# EAGLE board Qwiic GPS-RTK2 - ublox ZED-F9P-Panel (EAGLE 9.2.2), part 1 of 3
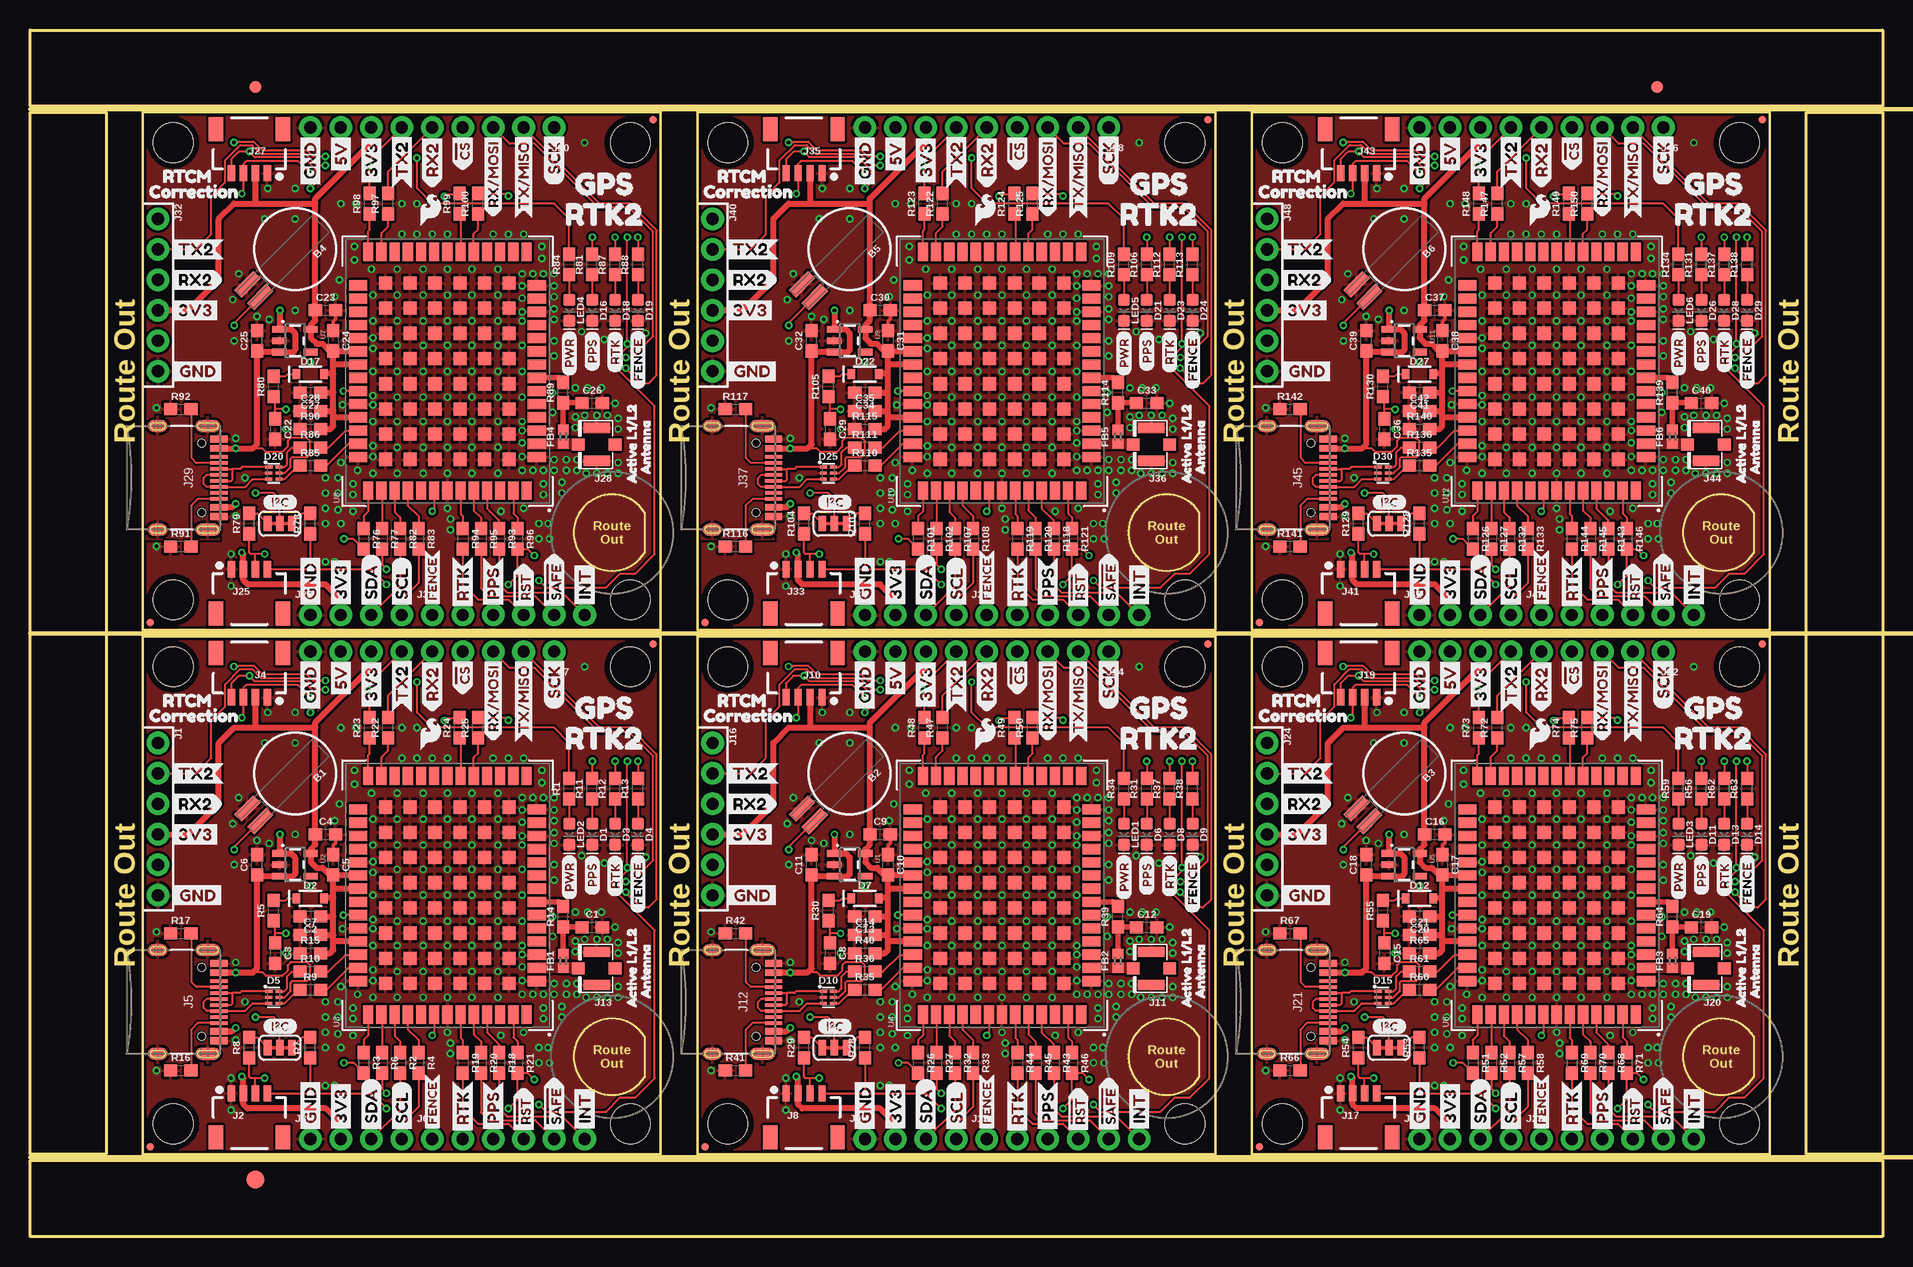
[diagram p0: board, top side]
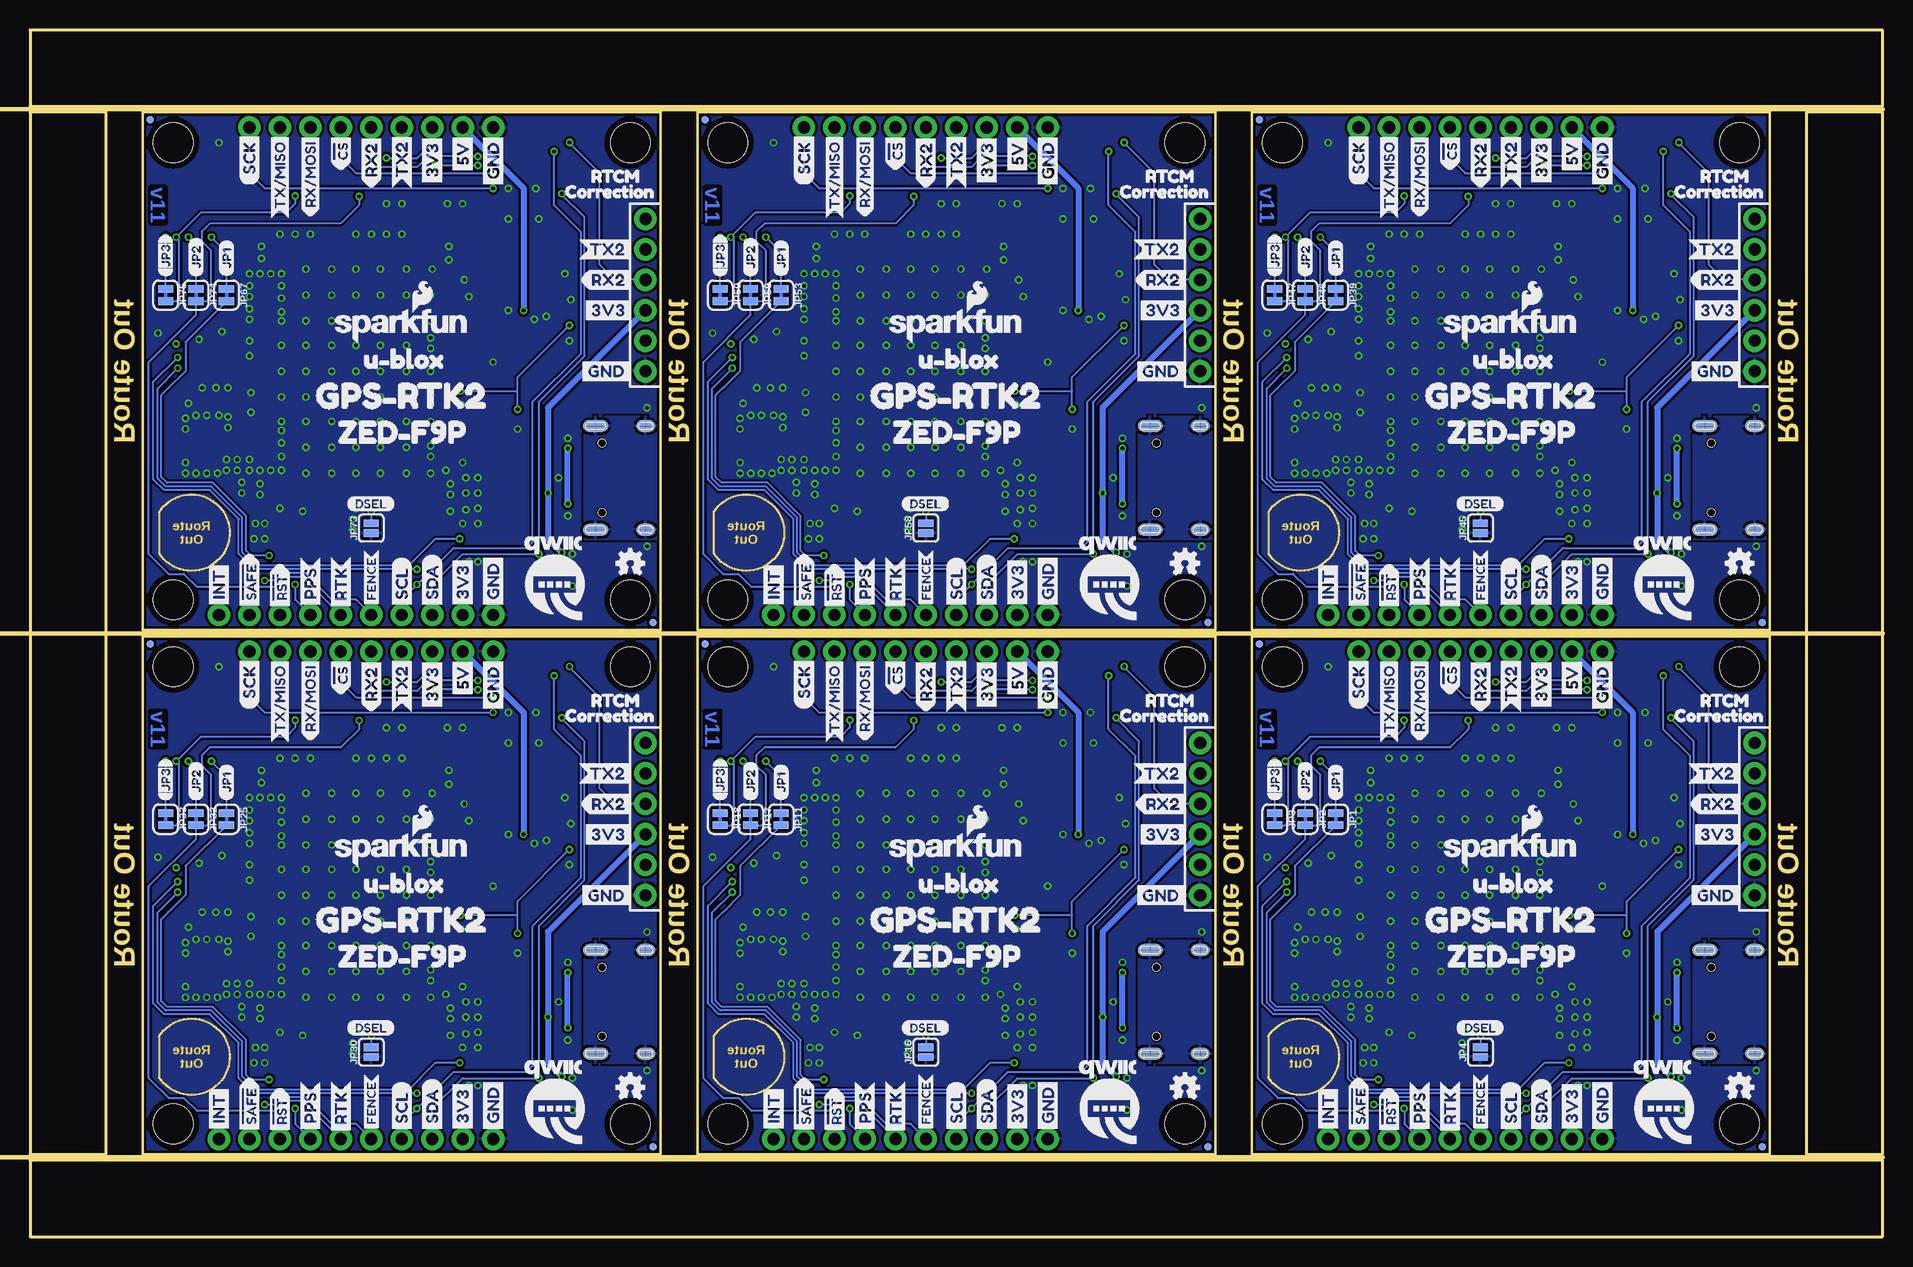
[diagram p1: board, bottom side, seen from below]

Size 154.43 x 100.58 mm. Coordinates in mm from the lower left corner, seen from the top.
Outline: 52.58,6.86 9.4,6.86 9.4,50.04 52.58,50.04 52.58,6.86
Outline: 98.81,6.86 55.63,6.86 55.63,50.04 98.81,50.04 98.81,6.86
Outline: 145.03,6.86 101.85,6.86 101.85,50.04 145.03,50.04 145.03,6.86
Outline: 52.58,50.55 9.4,50.55 9.4,93.73 52.58,93.73 52.58,50.55
Outline: 98.81,50.55 55.63,50.55 55.63,93.73 98.81,93.73 98.81,50.55
Outline: 145.03,50.55 101.85,50.55 101.85,93.73 145.03,93.73 145.03,50.55
Outline: 0,6.35 154.43,6.35 154.43,0 0,0 0,6.35
Outline: 148.08,93.73 154.43,93.73 154.43,6.86 148.08,6.86 148.08,93.73
Outline: 0,100.58 154.43,100.58 154.43,94.23 0,94.23 0,100.58
Outline: 0,93.73 6.35,93.73 6.35,6.86 0,6.86 0,93.73
Copper layers (1*16): Top 0.035mm / dielectric 1.5mm / Bottom 0.035mm
Design rules "SparkFun-2-layer-PCBWay-LIMIT": minimum track width 6mil, minimum drill 0.3mm, track to track 6mil, track to pad 6mil, pad to pad 6mil, via to via 6mil, smd to smd 6mil, copper to edge 6mil, drill to drill 6mil, minimum pad ring 6mil, minimum via ring 6mil, stop-mask expansion 4mil, vias tented up to drill 25mil, thermal gap 10mil
Net classes: 2 3.3V: width 0.508 mm
tRestrict: area 46.7,21.6 to 48.1,23.1; area 93,21.6 to 94.4,23.1; area 139.2,21.6 to 140.6,23.1; area 46.7,65.3 to 48.1,66.8; area 93,65.3 to 94.4,66.8; area 139.2,65.3 to 140.6,66.8
Milling: 3 lines

## Footprints (pad centres in the part's own frame; a part is rotated, then mirrored left to right if it is on the bottom)
BATTCON-6.8MM = smd 2.25 x 0.85: + 4.87,0.75; - 4.87,-0.75
0603 = smd 1.1 x 1: 1 -0.85,0; 2 0.85,0
LED-0603 = smd 1 x 1: A -0.877,0; C 0.877,0
SOD-323 = smd 0.63 x 0.83: A 1.15,0; C -1.15,0
SOT886 = smd 0.61 x 0.25: 1 -0.405,0.5 | smd 0.56 x 0.25: 2 -0.43,0; 3 -0.43,-0.5; 4 0.43,-0.5; 5 0.43,0; 6 0.43,0.5
FIDUCIAL-1X2 = smd 1 x 1: 1 0,0
FIDUCIAL-1.5X3 = smd 1.5 x 1.5: 1 0,0
0402 = smd 0.85 x 0.9: 1 -0.58,0; 2 0.58,0
1X06_NO_SILK = drill 1.016 pad 1.88: 1 0,0; 2 2.54,0; 3 5.08,0; 4 7.62,0; 5 10.16,0; 6 12.7,0
1X04_1MM_RA = smd 0.6 x 1.35: 1 -1.5,0; 2 -0.5,0; 3 0.5,0; 4 1.5,0 | smd 1.2 x 2: NC1 2.8,-3.675; NC2 -2.8,-3.675
1X04_NO_SILK = drill 1.016 pad 1.88: 1 0,0; 2 2.54,0; 3 5.08,0; 4 7.62,0
USB-C-16P = smd 0.3 x 1.45: A5 -1.25,0; A6 -0.25,0; A7 0.25,0; A8 1.25,0; B5 1.75,0; B6 0.75,0; B7 -0.75,0; B8 -1.75,0 | smd 0.6 x 1.45: GND -3.225,0; GND2 3.225,0 | smd 1 x 2.1: SHLD1 -4.32,-0.915; SHLD2 4.32,-0.915 | smd 1 x 2.1 bottom: SHLD3 -4.32,-0.915; SHLD4 4.32,-0.915 | smd 1 x 1.6: SHLD5 -4.32,-5.095; SHLD8 4.32,-5.095 | smd 1 x 1.6 bottom: SHLD6 -4.32,-5.095; SHLD7 4.32,-5.095 | smd 0.55 x 1.45: VBUS1 -2.45,0; VBUS2 2.45,0 | hole 0.65: -2.89,-1.445; 2.89,-1.445
1X09_NO_SILK = drill 1.016 pad 1.88: 1 0,0; 2 2.54,0; 3 5.08,0; 4 7.62,0; 5 10.16,0; 6 12.7,0; 7 15.24,0; 8 17.78,0; 9 20.32,0
U.FL = smd 2.2 x 0.85: 1 0,1.375; 2 0,-1.375 | smd 1.05 x 1: FEED 1.525,0; NC -1.525,0
SMT-JUMPER_2_NC_TRACE_SILK = smd 0.635 x 1.27: 1 -0.508,0; 2 0.508,0
SMT-JUMPER_2_NO_SILK = smd 0.635 x 1.27: 1 -0.406,0; 2 0.406,0
SMT-JUMPER_3_2-NC_TRACE_SILK = smd 0.635 x 1.27: 1 -1.016,0; 2 0,0; 3 1.016,0
STAND-OFF = hole 3.302: 0,0
MICRO-FIDUCIAL = smd 0.635 x 0.635: 1 0,0
SOT23-5 = smd 0.55 x 1.2: 1 -0.95,-1.3; 2 0,-1.3; 3 0.95,-1.3; 4 0.95,1.3; 5 -0.95,1.3
ZED-F9P = smd 0.85 x 1.52: 1 -7.15,-7.45; 2 -6.05,-7.45; 3 -4.95,-7.45; 4 -3.85,-7.45; 5 -2.75,-7.45; 6 -1.65,-7.45; 7 -0.55,-7.45; 8 0.55,-7.45; 9 1.65,-7.45; 10 2.75,-7.45; 11 3.85,-7.45; 12 4.95,-7.45; 13 6.05,-7.45; 14 7.15,-7.45; 28 7.15,7.45; 29 6.05,7.45; 30 4.95,7.45; 31 3.85,7.45; 32 2.75,7.45; 33 1.65,7.45; 34 0.55,7.45; 35 -0.55,7.45; 36 -1.65,7.45; 37 -2.75,7.45; 38 -3.85,7.45; 39 -4.95,7.45; 40 -6.05,7.45; 41 -7.15,7.45 | smd 1.52 x 0.85: 15 9.95,-6.6; 16 9.95,-5.5; 17 9.95,-4.4; 18 9.95,-3.3; 19 9.95,-2.2; 20 9.95,-1.1; 21 9.95,0; 22 9.95,1.1; 23 9.95,2.2; 24 9.95,3.3; 25 9.95,4.4; 26 9.95,5.5; 27 9.95,6.6; 42 -9.95,6.6; 43 -9.95,5.5; 44 -9.95,4.4; 45 -9.95,3.3; 46 -9.95,2.2; 47 -9.95,1.1; 48 -9.95,0; 49 -9.95,-1.1; 50 -9.95,-2.2; 51 -9.95,-3.3; 52 -9.95,-4.4; 53 -9.95,-5.5; 54 -9.95,-6.6 | smd 1.1 x 1.1: 55 -1.05,-1.05; 56 -3.15,-1.05; 57 -5.25,-1.05; 58 -7.35,-1.05; 59 -1.05,-3.1; 60 -3.15,-3.1; 61 -5.25,-3.1; 62 -7.35,-3.1; 63 -1.05,-5.15; 64 -3.15,-5.15; 65 -5.25,-5.15; 66 -7.35,-5.15; 67 -1.05,5.15; 68 -3.15,5.15; 69 -5.25,5.15; 70 -7.35,5.15; 71 -1.05,3.1; 72 -3.15,3.1; 73 -5.25,3.1; 74 -7.35,3.1; 75 -1.05,1.05; 76 -3.15,1.05; 77 -5.25,1.05; 78 -7.35,1.05; 79 1.05,1.05; 80 3.15,1.05; 81 5.25,1.05; 82 7.35,1.05; 83 1.05,3.1; 84 3.15,3.1; 85 5.25,3.1; 86 7.35,3.1; 87 1.05,5.15; 88 3.15,5.15; 89 5.25,5.15; 90 7.35,5.15; 91 1.05,-5.15; 92 3.15,-5.15; 93 5.25,-5.15; 94 7.35,-5.15; 95 1.05,-3.1; 96 3.15,-3.1; 97 5.25,-3.1; 98 7.35,-3.1; 99 1.05,-1.05; 100 3.15,-1.05; 101 5.25,-1.05; 102 7.35,-1.05

## Placement (x,y rotation side)
B1  6.8MM_COIN_CELL  [BATTCON-6.8MM]  22.1,38.61 225 top
B2  6.8MM_COIN_CELL  [BATTCON-6.8MM]  68.33,38.61 225 top
B3  6.8MM_COIN_CELL  [BATTCON-6.8MM]  114.55,38.61 225 top
B4  6.8MM_COIN_CELL  [BATTCON-6.8MM]  22.1,82.3 225 top
B5  6.8MM_COIN_CELL  [BATTCON-6.8MM]  68.33,82.3 225 top
B6  6.8MM_COIN_CELL  [BATTCON-6.8MM]  114.55,82.3 225 top
C1  47pF  [0603]  46.86,25.78 0 top
C2  1.0uF  [0603]  23.37,26.67 180 top
C3  1.0uF  [0603]  20.45,23.62 270 top
C4  1.0uF  [0603]  24.64,33.53 0 top
C5  0.1uF  [0603]  25.27,30.99 270 top
C6  1.0uF  [0603]  18.92,30.99 90 top
C7  0.1uF  [0603]  23.37,25.15 0 top
C8  1.0uF  [0603]  66.67,23.62 270 top
C9  1.0uF  [0603]  70.87,33.53 0 top
C10  0.1uF  [0603]  71.5,30.99 270 top
C11  1.0uF  [0603]  65.15,30.99 90 top
C12  47pF  [0603]  93.09,25.78 0 top
C13  1.0uF  [0603]  69.6,26.67 180 top
C14  0.1uF  [0603]  69.6,25.15 0 top
C15  1.0uF  [0603]  112.9,23.62 270 top
C16  1.0uF  [0603]  117.09,33.53 0 top
C17  0.1uF  [0603]  117.73,30.99 270 top
C18  1.0uF  [0603]  111.38,30.99 90 top
C19  47pF  [0603]  139.32,25.78 0 top
C20  1.0uF  [0603]  115.82,26.67 180 top
C21  0.1uF  [0603]  115.82,25.15 0 top
C22  1.0uF  [0603]  20.45,67.31 270 top
C23  1.0uF  [0603]  24.64,77.22 0 top
C24  0.1uF  [0603]  25.27,74.68 270 top
C25  1.0uF  [0603]  18.92,74.68 90 top
C26  47pF  [0603]  46.86,69.47 0 top
C27  1.0uF  [0603]  23.37,70.36 180 top
C28  0.1uF  [0603]  23.37,68.83 0 top
C29  1.0uF  [0603]  66.67,67.31 270 top
C30  1.0uF  [0603]  70.87,77.22 0 top
C31  0.1uF  [0603]  71.5,74.68 270 top
C32  1.0uF  [0603]  65.15,74.68 90 top
C33  47pF  [0603]  93.09,69.47 0 top
C34  1.0uF  [0603]  69.6,70.36 180 top
C35  0.1uF  [0603]  69.6,68.83 0 top
C36  1.0uF  [0603]  112.9,67.31 270 top
C37  1.0uF  [0603]  117.09,77.22 0 top
C38  0.1uF  [0603]  117.73,74.68 270 top
C39  1.0uF  [0603]  111.38,74.68 90 top
C40  47pF  [0603]  139.32,69.47 0 top
C41  1.0uF  [0603]  115.82,70.36 180 top
C42  0.1uF  [0603]  115.82,68.83 0 top
D1  Yellow  [LED-0603]  46.86,33.53 270 top
D2  0.5A/40V/420mV  [SOD-323]  23.37,28.19 0 top
D3  GREEN  [LED-0603]  48.77,33.53 270 top
D4  BLUE  [LED-0603]  50.67,33.53 270 top
D5  PRTR5V0U2F  [SOT886]  20.32,19.94 0 top
D6  Yellow  [LED-0603]  93.09,33.53 270 top
D7  0.5A/40V/420mV  [SOD-323]  69.6,28.19 0 top
D8  GREEN  [LED-0603]  95,33.53 270 top
D9  BLUE  [LED-0603]  96.9,33.53 270 top
D10  PRTR5V0U2F  [SOT886]  66.55,19.94 0 top
D11  Yellow  [LED-0603]  139.32,33.53 270 top
D12  0.5A/40V/420mV  [SOD-323]  115.82,28.19 0 top
D13  GREEN  [LED-0603]  141.22,33.53 270 top
D14  BLUE  [LED-0603]  143.13,33.53 270 top
D15  PRTR5V0U2F  [SOT886]  112.78,19.94 0 top
D16  Yellow  [LED-0603]  46.86,77.22 270 top
D17  0.5A/40V/420mV  [SOD-323]  23.37,71.88 0 top
D18  GREEN  [LED-0603]  48.77,77.22 270 top
D19  BLUE  [LED-0603]  50.67,77.22 270 top
D20  PRTR5V0U2F  [SOT886]  20.32,63.63 0 top
D21  Yellow  [LED-0603]  93.09,77.22 270 top
D22  0.5A/40V/420mV  [SOD-323]  69.6,71.88 0 top
D23  GREEN  [LED-0603]  95,77.22 270 top
D24  BLUE  [LED-0603]  96.9,77.22 270 top
D25  PRTR5V0U2F  [SOT886]  66.55,63.63 0 top
D26  Yellow  [LED-0603]  139.32,77.22 270 top
D27  0.5A/40V/420mV  [SOD-323]  115.82,71.88 0 top
D28  GREEN  [LED-0603]  141.22,77.22 270 top
D29  BLUE  [LED-0603]  143.13,77.22 270 top
D30  PRTR5V0U2F  [SOT886]  112.78,63.63 0 top
E$1  [FIDUCIAL-1X2]  18.8,95.82 0 top
E$2  [FIDUCIAL-1X2]  135.64,95.82 0 top
E$3  [FIDUCIAL-1.5X3]  18.8,4.76 0 top
FB1  FERRITE_BEAD-120_OHM-0402  [0402]  44.45,22.99 90 top
FB2  FERRITE_BEAD-120_OHM-0402  [0402]  90.68,22.99 90 top
FB3  FERRITE_BEAD-120_OHM-0402  [0402]  136.91,22.99 90 top
FB4  FERRITE_BEAD-120_OHM-0402  [0402]  44.45,66.67 90 top
FB5  FERRITE_BEAD-120_OHM-0402  [0402]  90.68,66.67 90 top
FB6  FERRITE_BEAD-120_OHM-0402  [0402]  136.91,66.67 90 top
J1  Radio  [1X06_NO_SILK]  10.67,41.15 270 top
J2  [1X04_1MM_RA]  18.29,11.94 0 top
J3  PTH  [1X04_NO_SILK]  23.37,8.13 0 top
J4  [1X04_1MM_RA]  18.29,44.96 180 top
J5  [USB-C-16P]  15.75,19.56 270 top
J6  [1X06_NO_SILK]  33.53,8.13 0 top
J7  [1X09_NO_SILK]  43.69,48.77 180 top
J8  [1X04_1MM_RA]  64.52,11.94 0 top
J9  PTH  [1X04_NO_SILK]  69.6,8.13 0 top
J10  [1X04_1MM_RA]  64.52,44.96 180 top
J11  U.FL  [U.FL]  93.47,22.35 180 top
J12  [USB-C-16P]  61.98,19.56 270 top
J13  U.FL  [U.FL]  47.24,22.35 180 top
J14  [1X09_NO_SILK]  89.92,48.77 180 top
J15  [1X06_NO_SILK]  79.76,8.13 0 top
J16  Radio  [1X06_NO_SILK]  56.9,41.15 270 top
J17  [1X04_1MM_RA]  110.74,11.94 0 top
J18  PTH  [1X04_NO_SILK]  115.82,8.13 0 top
J19  [1X04_1MM_RA]  110.74,44.96 180 top
J20  U.FL  [U.FL]  139.7,22.35 180 top
J21  [USB-C-16P]  108.2,19.56 270 top
J22  [1X09_NO_SILK]  136.14,48.77 180 top
J23  [1X06_NO_SILK]  125.98,8.13 0 top
J24  Radio  [1X06_NO_SILK]  103.12,41.15 270 top
J25  [1X04_1MM_RA]  18.29,55.63 0 top
J26  PTH  [1X04_NO_SILK]  23.37,51.82 0 top
J27  [1X04_1MM_RA]  18.29,88.65 180 top
J28  U.FL  [U.FL]  47.24,66.04 180 top
J29  [USB-C-16P]  15.75,63.25 270 top
J30  [1X09_NO_SILK]  43.69,92.46 180 top
J31  [1X06_NO_SILK]  33.53,51.82 0 top
J32  Radio  [1X06_NO_SILK]  10.67,84.84 270 top
J33  [1X04_1MM_RA]  64.52,55.63 0 top
J34  PTH  [1X04_NO_SILK]  69.6,51.82 0 top
J35  [1X04_1MM_RA]  64.52,88.65 180 top
J36  U.FL  [U.FL]  93.47,66.04 180 top
J37  [USB-C-16P]  61.98,63.25 270 top
J38  [1X09_NO_SILK]  89.92,92.46 180 top
J39  [1X06_NO_SILK]  79.76,51.82 0 top
J40  Radio  [1X06_NO_SILK]  56.9,84.84 270 top
J41  [1X04_1MM_RA]  110.74,55.63 0 top
J42  PTH  [1X04_NO_SILK]  115.82,51.82 0 top
J43  [1X04_1MM_RA]  110.74,88.65 180 top
J44  U.FL  [U.FL]  139.7,66.04 180 top
J45  [USB-C-16P]  108.2,63.25 270 top
J46  [1X09_NO_SILK]  136.14,92.46 180 top
J47  [1X06_NO_SILK]  125.98,51.82 0 top
J48  Radio  [1X06_NO_SILK]  103.12,84.84 270 top
JP1  [SMT-JUMPER_2_NC_TRACE_SILK]  45.59,34.8 270 bottom
JP2  [SMT-JUMPER_2_NC_TRACE_SILK]  48.13,34.8 270 bottom
JP3  [SMT-JUMPER_2_NC_TRACE_SILK]  50.67,34.8 270 bottom
JP4  [SMT-JUMPER_2_NO_SILK]  33.53,15.37 90 bottom
JP5  [SMT-JUMPER_3_2-NC_TRACE_SILK]  20.83,15.75 0 top
JP6  STAND-OFF  [STAND-OFF]  58.17,9.4 90 top
JP7  STAND-OFF  [STAND-OFF]  58.17,47.5 90 top
JP8  FIDUCIALUFIDUCIAL  [MICRO-FIDUCIAL]  98.17,49.4 90 top
JP9  FIDUCIALUFIDUCIAL  [MICRO-FIDUCIAL]  56.26,7.49 90 top
JP10  [SMT-JUMPER_3_2-NC_TRACE_SILK]  67.06,15.75 0 top
JP11  [SMT-JUMPER_2_NC_TRACE_SILK]  91.82,34.8 270 bottom
JP12  FIDUCIALUFIDUCIAL  [MICRO-FIDUCIAL]  98.17,49.4 270 bottom
JP13  FIDUCIALUFIDUCIAL  [MICRO-FIDUCIAL]  56.26,7.49 270 bottom
JP14  STAND-OFF  [STAND-OFF]  96.27,9.4 90 top
JP15  STAND-OFF  [STAND-OFF]  96.27,47.5 90 top
JP16  [SMT-JUMPER_2_NO_SILK]  79.76,15.37 90 bottom
JP17  [SMT-JUMPER_2_NC_TRACE_SILK]  94.36,34.8 270 bottom
JP18  [SMT-JUMPER_2_NC_TRACE_SILK]  96.9,34.8 270 bottom
JP19  STAND-OFF  [STAND-OFF]  104.39,9.4 90 top
JP20  STAND-OFF  [STAND-OFF]  104.39,47.5 90 top
JP21  FIDUCIALUFIDUCIAL  [MICRO-FIDUCIAL]  51.94,49.4 90 top
JP22  FIDUCIALUFIDUCIAL  [MICRO-FIDUCIAL]  144.4,49.4 90 top
JP23  FIDUCIALUFIDUCIAL  [MICRO-FIDUCIAL]  102.49,7.49 90 top
JP24  [SMT-JUMPER_3_2-NC_TRACE_SILK]  113.28,15.75 0 top
JP25  [SMT-JUMPER_2_NC_TRACE_SILK]  138.05,34.8 270 bottom
JP26  FIDUCIALUFIDUCIAL  [MICRO-FIDUCIAL]  144.4,49.4 270 bottom
JP27  FIDUCIALUFIDUCIAL  [MICRO-FIDUCIAL]  102.49,7.49 270 bottom
JP28  STAND-OFF  [STAND-OFF]  142.49,9.4 90 top
JP29  STAND-OFF  [STAND-OFF]  142.49,47.5 90 top
JP30  [SMT-JUMPER_2_NO_SILK]  125.98,15.37 90 bottom
JP31  STAND-OFF  [STAND-OFF]  11.94,9.4 90 top
JP32  [SMT-JUMPER_2_NC_TRACE_SILK]  140.59,34.8 270 bottom
JP33  [SMT-JUMPER_2_NC_TRACE_SILK]  143.13,34.8 270 bottom
JP34  STAND-OFF  [STAND-OFF]  11.94,53.09 90 top
JP35  STAND-OFF  [STAND-OFF]  11.94,91.19 90 top
JP36  FIDUCIALUFIDUCIAL  [MICRO-FIDUCIAL]  51.94,93.09 90 top
JP37  FIDUCIALUFIDUCIAL  [MICRO-FIDUCIAL]  10.03,51.18 90 top
JP38  [SMT-JUMPER_3_2-NC_TRACE_SILK]  20.83,59.44 0 top
JP39  [SMT-JUMPER_2_NC_TRACE_SILK]  45.59,78.49 270 bottom
JP40  FIDUCIALUFIDUCIAL  [MICRO-FIDUCIAL]  51.94,93.09 270 bottom
JP41  STAND-OFF  [STAND-OFF]  11.94,47.5 90 top
JP42  FIDUCIALUFIDUCIAL  [MICRO-FIDUCIAL]  10.03,51.18 270 bottom
JP43  STAND-OFF  [STAND-OFF]  50.04,53.09 90 top
JP44  STAND-OFF  [STAND-OFF]  50.04,91.19 90 top
JP45  [SMT-JUMPER_2_NO_SILK]  33.53,59.05 90 bottom
JP46  [SMT-JUMPER_2_NC_TRACE_SILK]  48.13,78.49 270 bottom
JP47  [SMT-JUMPER_2_NC_TRACE_SILK]  50.67,78.49 270 bottom
JP48  STAND-OFF  [STAND-OFF]  58.17,53.09 90 top
JP49  STAND-OFF  [STAND-OFF]  58.17,91.19 90 top
JP50  FIDUCIALUFIDUCIAL  [MICRO-FIDUCIAL]  98.17,93.09 90 top
JP51  FIDUCIALUFIDUCIAL  [MICRO-FIDUCIAL]  56.26,51.18 90 top
JP52  [SMT-JUMPER_3_2-NC_TRACE_SILK]  67.06,59.44 0 top
JP53  [SMT-JUMPER_2_NC_TRACE_SILK]  91.82,78.49 270 bottom
JP54  FIDUCIALUFIDUCIAL  [MICRO-FIDUCIAL]  98.17,93.09 270 bottom
JP55  FIDUCIALUFIDUCIAL  [MICRO-FIDUCIAL]  56.26,51.18 270 bottom
JP56  STAND-OFF  [STAND-OFF]  96.27,53.09 90 top
JP57  STAND-OFF  [STAND-OFF]  96.27,91.19 90 top
JP58  [SMT-JUMPER_2_NO_SILK]  79.76,59.05 90 bottom
JP59  [SMT-JUMPER_2_NC_TRACE_SILK]  94.36,78.49 270 bottom
JP60  [SMT-JUMPER_2_NC_TRACE_SILK]  96.9,78.49 270 bottom
JP61  FIDUCIALUFIDUCIAL  [MICRO-FIDUCIAL]  10.03,7.49 90 top
JP62  STAND-OFF  [STAND-OFF]  104.39,53.09 90 top
JP63  STAND-OFF  [STAND-OFF]  104.39,91.19 90 top
JP64  FIDUCIALUFIDUCIAL  [MICRO-FIDUCIAL]  144.4,93.09 90 top
JP65  FIDUCIALUFIDUCIAL  [MICRO-FIDUCIAL]  102.49,51.18 90 top
JP66  [SMT-JUMPER_3_2-NC_TRACE_SILK]  113.28,59.44 0 top
JP67  [SMT-JUMPER_2_NC_TRACE_SILK]  138.05,78.49 270 bottom
JP68  FIDUCIALUFIDUCIAL  [MICRO-FIDUCIAL]  144.4,93.09 270 bottom
JP69  FIDUCIALUFIDUCIAL  [MICRO-FIDUCIAL]  102.49,51.18 270 bottom
JP70  STAND-OFF  [STAND-OFF]  142.49,53.09 90 top
JP71  FIDUCIALUFIDUCIAL  [MICRO-FIDUCIAL]  51.94,49.4 270 bottom
JP72  STAND-OFF  [STAND-OFF]  142.49,91.19 90 top
JP73  [SMT-JUMPER_2_NO_SILK]  125.98,59.05 90 bottom
JP74  [SMT-JUMPER_2_NC_TRACE_SILK]  140.59,78.49 270 bottom
JP75  [SMT-JUMPER_2_NC_TRACE_SILK]  143.13,78.49 270 bottom
JP81  FIDUCIALUFIDUCIAL  [MICRO-FIDUCIAL]  10.03,7.49 270 bottom
JP91  STAND-OFF  [STAND-OFF]  50.04,9.4 90 top
JP101  STAND-OFF  [STAND-OFF]  50.04,47.5 90 top
LED1  RED  [LED-0603]  91.19,33.53 270 top
LED2  RED  [LED-0603]  44.96,33.53 270 top
LED3  RED  [LED-0603]  137.41,33.53 270 top
LED4  RED  [LED-0603]  44.96,77.22 270 top
LED5  RED  [LED-0603]  91.19,77.22 270 top
LED6  RED  [LED-0603]  137.41,77.22 270 top
LOGO1  OSHW-LOGOMINI  [OSHW-LOGO-MINI]  11.94,12.45 0 bottom
LOGO2  SFE_LOGO_NAME_FLAME.1_INCH  [SFE_LOGO_NAME_FLAME_.1]  30.99,32.26 0 bottom
LOGO3  OSHW-LOGOMINI  [OSHW-LOGO-MINI]  58.17,12.45 0 bottom
LOGO4  SFE_LOGO_NAME_FLAME.1_INCH  [SFE_LOGO_NAME_FLAME_.1]  77.22,32.26 0 bottom
LOGO5  OSHW-LOGOMINI  [OSHW-LOGO-MINI]  104.39,12.45 0 bottom
LOGO6  SFE_LOGO_NAME_FLAME.1_INCH  [SFE_LOGO_NAME_FLAME_.1]  123.44,32.26 0 bottom
LOGO7  OSHW-LOGOMINI  [OSHW-LOGO-MINI]  11.94,56.13 0 bottom
LOGO8  SFE_LOGO_NAME_FLAME.1_INCH  [SFE_LOGO_NAME_FLAME_.1]  30.99,75.95 0 bottom
LOGO9  OSHW-LOGOMINI  [OSHW-LOGO-MINI]  58.17,56.13 0 bottom
LOGO10  SFE_LOGO_NAME_FLAME.1_INCH  [SFE_LOGO_NAME_FLAME_.1]  77.22,75.95 0 bottom
LOGO11  OSHW-LOGOMINI  [OSHW-LOGO-MINI]  104.39,56.13 0 bottom
LOGO12  SFE_LOGO_NAME_FLAME.1_INCH  [SFE_LOGO_NAME_FLAME_.1]  123.44,75.95 0 bottom
R1  1k  [0603]  44.96,37.34 90 top
R2  33  [0603]  30.86,14.48 270 top
R3  33  [0603]  27.81,14.48 270 top
R4  33  [0603]  32.38,14.48 270 top
R5  1k  [0603]  20.32,27.18 90 top
R6  33  [0603]  29.34,14.48 270 top
R7  2.2k  [0603]  23.37,15.75 90 top
R8  2.2k  [0603]  18.29,15.75 90 top
R9  27  [0603]  23.37,20.57 0 top
R10  27  [0603]  23.37,22.1 0 top
R11  1k  [0603]  46.86,37.34 90 top
R12  1k  [0603]  48.77,37.34 90 top
R13  1k  [0603]  50.67,37.34 90 top
R14  10  [0603]  44.45,26.67 90 top
R15  100k  [0603]  23.37,23.62 0 top
R16  5.1k  [0603]  12.57,13.84 0 top
R17  5.1k  [0603]  12.57,25.27 0 top
R18  33  [0603]  39.12,14.48 270 top
R19  33  [0603]  36.07,14.48 270 top
R20  33  [0603]  37.59,14.48 270 top
R21  33  [0603]  40.64,14.48 270 top
R22  33  [0603]  29.84,42.42 90 top
R23  33  [0603]  28.32,42.42 90 top
R24  33  [0603]  35.81,42.42 90 top
R25  33  [0603]  37.34,42.42 90 top
R26  33  [0603]  74.04,14.48 270 top
R27  33  [0603]  75.56,14.48 270 top
R28  2.2k  [0603]  69.6,15.75 90 top
R29  2.2k  [0603]  64.52,15.75 90 top
R30  1k  [0603]  66.55,27.18 90 top
R31  1k  [0603]  93.09,37.34 90 top
R32  33  [0603]  77.09,14.48 270 top
R33  33  [0603]  78.61,14.48 270 top
R34  1k  [0603]  91.19,37.34 90 top
R35  27  [0603]  69.6,20.57 0 top
R36  27  [0603]  69.6,22.1 0 top
R37  1k  [0603]  95,37.34 90 top
R38  1k  [0603]  96.9,37.34 90 top
R39  10  [0603]  90.68,26.67 90 top
R40  100k  [0603]  69.6,23.62 0 top
R41  5.1k  [0603]  58.8,13.84 0 top
R42  5.1k  [0603]  58.8,25.27 0 top
R43  33  [0603]  85.34,14.48 270 top
R44  33  [0603]  82.3,14.48 270 top
R45  33  [0603]  83.82,14.48 270 top
R46  33  [0603]  86.87,14.48 270 top
R47  33  [0603]  76.07,42.42 90 top
R48  33  [0603]  74.55,42.42 90 top
R49  33  [0603]  82.04,42.42 90 top
R50  33  [0603]  83.57,42.42 90 top
R51  33  [0603]  120.27,14.48 270 top
R52  33  [0603]  121.79,14.48 270 top
R53  2.2k  [0603]  115.82,15.75 90 top
R54  2.2k  [0603]  110.74,15.75 90 top
R55  1k  [0603]  112.78,27.18 90 top
R56  1k  [0603]  139.32,37.34 90 top
R57  33  [0603]  123.32,14.48 270 top
R58  33  [0603]  124.84,14.48 270 top
R59  1k  [0603]  137.41,37.34 90 top
R60  27  [0603]  115.82,20.57 0 top
R61  27  [0603]  115.82,22.1 0 top
R62  1k  [0603]  141.22,37.34 90 top
R63  1k  [0603]  143.13,37.34 90 top
R64  10  [0603]  136.91,26.67 90 top
R65  100k  [0603]  115.82,23.62 0 top
R66  5.1k  [0603]  105.03,13.84 0 top
R67  5.1k  [0603]  105.03,25.27 0 top
R68  33  [0603]  131.57,14.48 270 top
R69  33  [0603]  128.52,14.48 270 top
R70  33  [0603]  130.05,14.48 270 top
R71  33  [0603]  133.1,14.48 270 top
R72  33  [0603]  122.3,42.42 90 top
R73  33  [0603]  120.78,42.42 90 top
R74  33  [0603]  128.27,42.42 90 top
R75  33  [0603]  129.79,42.42 90 top
R76  33  [0603]  27.81,58.17 270 top
R77  33  [0603]  29.34,58.17 270 top
R78  2.2k  [0603]  23.37,59.44 90 top
R79  2.2k  [0603]  18.29,59.44 90 top
R80  1k  [0603]  20.32,70.87 90 top
R81  1k  [0603]  46.86,81.03 90 top
R82  33  [0603]  30.86,58.17 270 top
R83  33  [0603]  32.38,58.17 270 top
R84  1k  [0603]  44.96,81.03 90 top
R85  27  [0603]  23.37,64.26 0 top
R86  27  [0603]  23.37,65.79 0 top
R87  1k  [0603]  48.77,81.03 90 top
R88  1k  [0603]  50.67,81.03 90 top
R89  10  [0603]  44.45,70.36 90 top
R90  100k  [0603]  23.37,67.31 0 top
R91  5.1k  [0603]  12.57,57.53 0 top
R92  5.1k  [0603]  12.57,68.96 0 top
R93  33  [0603]  39.12,58.17 270 top
R94  33  [0603]  36.07,58.17 270 top
R95  33  [0603]  37.59,58.17 270 top
R96  33  [0603]  40.64,58.17 270 top
R97  33  [0603]  29.84,86.11 90 top
R98  33  [0603]  28.32,86.11 90 top
R99  33  [0603]  35.81,86.11 90 top
R100  33  [0603]  37.34,86.11 90 top
R101  33  [0603]  74.04,58.17 270 top
R102  33  [0603]  75.56,58.17 270 top
R103  2.2k  [0603]  69.6,59.44 90 top
R104  2.2k  [0603]  64.52,59.44 90 top
R105  1k  [0603]  66.55,70.87 90 top
R106  1k  [0603]  93.09,81.03 90 top
R107  33  [0603]  77.09,58.17 270 top
R108  33  [0603]  78.61,58.17 270 top
R109  1k  [0603]  91.19,81.03 90 top
R110  27  [0603]  69.6,64.26 0 top
R111  27  [0603]  69.6,65.79 0 top
R112  1k  [0603]  95,81.03 90 top
R113  1k  [0603]  96.9,81.03 90 top
R114  10  [0603]  90.68,70.36 90 top
R115  100k  [0603]  69.6,67.31 0 top
R116  5.1k  [0603]  58.8,57.53 0 top
R117  5.1k  [0603]  58.8,68.96 0 top
R118  33  [0603]  85.34,58.17 270 top
R119  33  [0603]  82.3,58.17 270 top
R120  33  [0603]  83.82,58.17 270 top
R121  33  [0603]  86.87,58.17 270 top
R122  33  [0603]  76.07,86.11 90 top
R123  33  [0603]  74.55,86.11 90 top
R124  33  [0603]  82.04,86.11 90 top
R125  33  [0603]  83.57,86.11 90 top
R126  33  [0603]  120.27,58.17 270 top
R127  33  [0603]  121.79,58.17 270 top
R128  2.2k  [0603]  115.82,59.44 90 top
R129  2.2k  [0603]  110.74,59.44 90 top
R130  1k  [0603]  112.78,70.87 90 top
R131  1k  [0603]  139.32,81.03 90 top
R132  33  [0603]  123.32,58.17 270 top
R133  33  [0603]  124.84,58.17 270 top
R134  1k  [0603]  137.41,81.03 90 top
R135  27  [0603]  115.82,64.26 0 top
R136  27  [0603]  115.82,65.79 0 top
R137  1k  [0603]  141.22,81.03 90 top
R138  1k  [0603]  143.13,81.03 90 top
R139  10  [0603]  136.91,70.36 90 top
R140  100k  [0603]  115.82,67.31 0 top
R141  5.1k  [0603]  105.03,57.53 0 top
R142  5.1k  [0603]  105.03,68.96 0 top
R143  33  [0603]  131.57,58.17 270 top
R144  33  [0603]  128.52,58.17 270 top
R145  33  [0603]  130.05,58.17 270 top
R146  33  [0603]  133.1,58.17 270 top
R147  33  [0603]  122.3,86.11 90 top
R148  33  [0603]  120.78,86.11 90 top
R149  33  [0603]  128.27,86.11 90 top
R150  33  [0603]  129.79,86.11 90 top
U1  3.3V  [SOT23-5]  68.33,30.99 270 top
U2  3.3V  [SOT23-5]  22.1,30.99 270 top
U3  ZED-F9P  [ZED-F9P]  34.8,28.45 90 top
U4  ZED-F9P  [ZED-F9P]  81.03,28.45 90 top
U5  3.3V  [SOT23-5]  114.55,30.99 270 top
U6  ZED-F9P  [ZED-F9P]  127.25,28.45 90 top
U7  3.3V  [SOT23-5]  22.1,74.68 270 top
U8  ZED-F9P  [ZED-F9P]  34.8,72.14 90 top
U9  3.3V  [SOT23-5]  68.33,74.68 270 top
U10  ZED-F9P  [ZED-F9P]  81.03,72.14 90 top
U11  3.3V  [SOT23-5]  114.55,74.68 270 top
U12  ZED-F9P  [ZED-F9P]  127.25,72.14 90 top
U$1  [SDA-[)]  28.45,8.51 90 top
U$2  [SDA-[)]  74.68,8.51 90 top
U$3  [SCL-[)]  30.99,8.51 90 top
U$4  [SDA-[)]  28.45,8.51 90 bottom
U$5  [SCL-[)]  30.99,8.51 90 bottom
U$6  [3V3-04]  25.91,8.51 90 top
U$7  [3V3-04]  25.91,8.51 90 bottom
U$8  [GND-04]  23.37,8.51 90 top
U$9  [GND-04]  23.37,8.51 90 bottom
U$10  [I_SUPER2_C-()-03]  19.43,17.53 0 top
U$11  [FENCE2]  50.67,26.92 90 top
U$12  [JP20]  48.13,36.32 90 bottom
U$13  [RTK1]  48.77,28.32 90 top
U$14  [FENCE0]  33.53,8.64 90 top
U$15  [INT8]  46.23,8.51 90 top
U$16  [INT8]  46.23,8.51 90 bottom
U$17  [FENCE0]  33.53,8.64 90 bottom
U$18  [PWR-()-03]  44.96,28.07 90 top
U$19  [5V]  25.91,44.7 90 top
U$20  [5V]  25.91,44.7 90 bottom
U$21  [RX20]  33.53,43.69 90 top
U$22  [U#BLOX3]  35.56,29.46 0 bottom
U$23  [CS#-<]]  36.07,44.96 90 top
U$24  [CS#-<]]  36.07,44.96 90 bottom
U$25  [JP10]  45.59,36.32 90 bottom
U$26  [RX#MOSI3]  38.61,41.27 90 top
U$27  [DSEL0]  35.56,17.4 0 bottom
U$28  [RTK1]  36.07,8.38 90 bottom
U$29  [RTK1]  36.07,8.38 90 top
U$30  [QWIIC-LOGO-MEDIUM]  18.29,11.18 0 bottom
U$31  [RX#MOSI3]  38.61,41.27 90 bottom
U$32  [JP32]  50.67,36.32 90 bottom
U$33  [SFE_LOGO_FLAME_.1]  33.4,41.91 0 top
U$34  [TX#MISO1]  41.15,41.15 90 top
U$35  [#RST3]  41.15,8.25 90 top
U$36  [#RST3]  41.15,8.25 90 bottom
U$37  [TX#MISO1]  41.15,41.15 90 bottom
U$38  [SCK-(]-04]  43.69,43.94 90 top
U$39  [#SAFE1]  43.69,8.25 90 top
U$40  [#SAFE1]  43.69,8.25 90 bottom
U$41  [SCK-(]-04]  43.69,43.94 90 bottom
U$42  [RX22]  11.43,36.07 0 top
U$43  [PPS5]  38.61,8.51 90 top
U$44  [PPS5]  38.61,8.51 90 bottom
U$45  [GND3]  11.56,28.45 0 top
U$46  [GPS#RTK28]  40,26.42 0 bottom
U$47  [SCL-[)]  77.22,8.51 90 top
U$48  [RTCM5]  16.13,44.7 0 bottom
U$49  [ZED#F9P6]  37.85,23.37 0 bottom
U$50  [TX21]  30.99,43.69 90 top
U$51  [TX23]  11.43,38.61 0 top
U$52  [PPS0]  46.86,28.45 90 top
U$53  [CORRECTION0]  18.29,43.43 0 bottom
U$54  SMA-ANTENNA-THREADED  [SMA-THREADED]  48.51,14.99 0 top
U$55  [TX21]  30.99,43.69 90 bottom
U$56  [RX20]  33.53,43.69 90 bottom
U$57  [TX21]  16.26,38.61 0 bottom
U$58  [RX20]  16.13,36.07 0 bottom
U$59  [GPS0]  43.81,44.07 0 top
U$60  [3V3-04]  28.45,43.69 90 bottom
U$61  [3V3-04]  28.45,43.69 90 top
U$62  [GND-04]  23.37,43.56 90 bottom
U$63  [GND-04]  23.37,43.56 90 top
U$64  [RTK21]  42.67,41.53 0 top
U$65  [ACTIVE_L1#L21]  50.17,18.41 90 top
U$66  [3V3-04]  11.43,33.53 0 top
U$67  [3V3-04]  16.13,33.53 0 bottom
U$68  [GND3]  16.38,28.45 0 bottom
U$69  [CORRECTION0]  9.02,43.43 0 top
U$70  [RTCM5]  10.16,44.7 0 top
U$71  [ANTENNA2]  51.31,19.18 90 top
U$72  [SDA-[)]  74.68,8.51 90 bottom
U$73  [SCL-[)]  77.22,8.51 90 bottom
U$74  [3V3-04]  72.14,8.51 90 top
U$75  [3V3-04]  72.14,8.51 90 bottom
U$76  [GND-04]  69.6,8.51 90 top
U$77  [GND-04]  69.6,8.51 90 bottom
U$78  [I_SUPER2_C-()-03]  65.66,17.53 0 top
U$79  [INT8]  92.46,8.51 90 top
U$80  [INT8]  92.46,8.51 90 bottom
U$81  [U#BLOX3]  81.79,29.46 0 bottom
U$82  [QWIIC-LOGO-MEDIUM]  64.52,11.18 0 bottom
U$83  [#RST3]  87.38,8.25 90 top
U$84  [#RST3]  87.38,8.25 90 bottom
U$85  [#SAFE1]  89.92,8.25 90 top
U$86  [#SAFE1]  89.92,8.25 90 bottom
U$87  [PPS5]  84.84,8.51 90 top
U$88  [PPS5]  84.84,8.51 90 bottom
U$89  [PPS0]  93.09,28.45 90 top
U$90  [FENCE2]  96.9,26.92 90 top
U$91  [JP20]  94.36,36.32 90 bottom
U$92  [RTK1]  95,28.32 90 top
U$93  [FENCE0]  79.76,8.64 90 top
U$94  [FENCE0]  79.76,8.64 90 bottom
U$95  [RTK1]  82.3,8.38 90 bottom
U$96  [RTK1]  82.3,8.38 90 top
U$97  [3V3-04]  74.68,43.69 90 bottom
U$98  [3V3-04]  74.68,43.69 90 top
U$99  [GND-04]  69.6,43.56 90 bottom
U$100  [GND-04]  69.6,43.56 90 top
U$101  [JP10]  91.82,36.32 90 bottom
U$102  [JP32]  96.9,36.32 90 bottom
U$103  [DSEL0]  81.79,17.4 0 bottom
U$104  [PWR-()-03]  91.19,28.07 90 top
U$105  [5V]  72.14,44.7 90 top
U$106  [5V]  72.14,44.7 90 bottom
U$107  [CS#-<]]  82.3,44.96 90 top
U$108  [CS#-<]]  82.3,44.96 90 bottom
U$109  [SCK-(]-04]  89.92,43.94 90 top
U$110  [SCK-(]-04]  89.92,43.94 90 bottom
U$111  [SFE_LOGO_FLAME_.1]  79.63,41.91 0 top
U$112  [RX#MOSI3]  84.84,41.27 90 bottom
U$113  [TX#MISO1]  87.38,41.15 90 bottom
U$114  [GND3]  57.78,28.45 0 top
U$115  [GPS#RTK28]  86.23,26.42 0 bottom
U$116  [3V3-04]  57.66,33.53 0 top
U$117  [3V3-04]  62.36,33.53 0 bottom
U$118  [GND3]  62.61,28.45 0 bottom
U$119  [CORRECTION0]  55.25,43.43 0 top
U$120  [RTCM5]  56.39,44.7 0 top
U$121  [ZED#F9P6]  84.07,23.37 0 bottom
U$122  [RTCM5]  62.36,44.7 0 bottom
U$123  [CORRECTION0]  64.52,43.43 0 bottom
U$124  [RX#MOSI3]  84.84,41.27 90 top
U$125  [TX#MISO1]  87.38,41.15 90 top
U$126  SMA-ANTENNA-THREADED  [SMA-THREADED]  94.74,14.99 0 top
U$127  [ACTIVE_L1#L21]  96.39,18.41 90 top
U$128  [ANTENNA2]  97.54,19.18 90 top
U$129  [RX20]  79.76,43.69 90 top
U$130  [RX22]  57.66,36.07 0 top
U$131  [TX21]  77.22,43.69 90 top
U$132  [TX23]  57.66,38.61 0 top
U$133  [TX21]  77.22,43.69 90 bottom
U$134  [RX20]  79.76,43.69 90 bottom
U$135  [TX21]  62.48,38.61 0 bottom
U$136  [RX20]  62.36,36.07 0 bottom
U$137  [GPS0]  90.04,44.07 0 top
U$138  [RTK21]  88.9,41.53 0 top
U$139  [SDA-[)]  120.9,8.51 90 top
U$140  [SCL-[)]  123.44,8.51 90 top
U$141  [SDA-[)]  120.9,8.51 90 bottom
U$142  [SCL-[)]  123.44,8.51 90 bottom
U$143  [3V3-04]  118.36,8.51 90 top
U$144  [3V3-04]  118.36,8.51 90 bottom
U$145  [GND-04]  115.82,8.51 90 top
U$146  [GND-04]  115.82,8.51 90 bottom
U$147  [I_SUPER2_C-()-03]  111.89,17.53 0 top
U$148  [INT8]  138.68,8.51 90 top
U$149  [INT8]  138.68,8.51 90 bottom
U$150  [U#BLOX3]  128.02,29.46 0 bottom
U$151  [QWIIC-LOGO-MEDIUM]  110.74,11.18 0 bottom
U$152  [#RST3]  133.6,8.25 90 top
U$153  [#RST3]  133.6,8.25 90 bottom
U$154  [#SAFE1]  136.14,8.25 90 top
U$155  [#SAFE1]  136.14,8.25 90 bottom
U$156  [PPS5]  131.06,8.51 90 top
U$157  [PPS5]  131.06,8.51 90 bottom
U$158  [PPS0]  139.32,28.45 90 top
U$159  [FENCE2]  143.13,26.92 90 top
U$160  [JP20]  140.59,36.32 90 bottom
U$161  [RTK1]  141.22,28.32 90 top
U$162  [FENCE0]  125.98,8.64 90 top
U$163  [FENCE0]  125.98,8.64 90 bottom
U$164  [RTK1]  128.52,8.38 90 bottom
U$165  [RTK1]  128.52,8.38 90 top
U$166  [3V3-04]  120.9,43.69 90 bottom
U$167  [3V3-04]  120.9,43.69 90 top
U$168  [GND-04]  115.82,43.56 90 bottom
U$169  [GND-04]  115.82,43.56 90 top
U$170  [JP10]  138.05,36.32 90 bottom
U$171  [JP32]  143.13,36.32 90 bottom
U$172  [DSEL0]  128.02,17.4 0 bottom
U$173  [PWR-()-03]  137.41,28.07 90 top
U$174  [5V]  118.36,44.7 90 top
U$175  [5V]  118.36,44.7 90 bottom
U$176  [CS#-<]]  128.52,44.96 90 top
U$177  [CS#-<]]  128.52,44.96 90 bottom
U$178  [SCK-(]-04]  136.14,43.94 90 top
U$179  [SCK-(]-04]  136.14,43.94 90 bottom
U$180  [SFE_LOGO_FLAME_.1]  125.86,41.91 0 top
U$181  [RX#MOSI3]  131.06,41.27 90 bottom
U$182  [TX#MISO1]  133.6,41.15 90 bottom
U$183  [GND3]  104.01,28.45 0 top
U$184  [GPS#RTK28]  132.46,26.42 0 bottom
U$185  [3V3-04]  103.89,33.53 0 top
U$186  [3V3-04]  108.58,33.53 0 bottom
U$187  [GND3]  108.84,28.45 0 bottom
U$188  [CORRECTION0]  101.47,43.43 0 top
U$189  [RTCM5]  102.62,44.7 0 top
U$190  [ZED#F9P6]  130.3,23.37 0 bottom
U$191  [RTCM5]  108.58,44.7 0 bottom
U$192  [CORRECTION0]  110.74,43.43 0 bottom
U$193  [RX#MOSI3]  131.06,41.27 90 top
U$194  [TX#MISO1]  133.6,41.15 90 top
U$195  SMA-ANTENNA-THREADED  [SMA-THREADED]  140.97,14.99 0 top
U$196  [ACTIVE_L1#L21]  142.62,18.41 90 top
U$197  [ANTENNA2]  143.76,19.18 90 top
U$198  [RX20]  125.98,43.69 90 top
U$199  [RX22]  103.89,36.07 0 top
U$200  [TX21]  123.44,43.69 90 top
U$201  [TX23]  103.89,38.61 0 top
U$202  [TX21]  123.44,43.69 90 bottom
U$203  [RX20]  125.98,43.69 90 bottom
U$204  [TX21]  108.71,38.61 0 bottom
U$205  [RX20]  108.58,36.07 0 bottom
U$206  [GPS0]  136.27,44.07 0 top
U$207  [RTK21]  135.13,41.53 0 top
U$208  [SDA-[)]  28.45,52.2 90 top
U$209  [SCL-[)]  30.99,52.2 90 top
U$210  [SDA-[)]  28.45,52.2 90 bottom
U$211  [SCL-[)]  30.99,52.2 90 bottom
U$212  [3V3-04]  25.91,52.2 90 top
U$213  [3V3-04]  25.91,52.2 90 bottom
U$214  [GND-04]  23.37,52.2 90 top
U$215  [GND-04]  23.37,52.2 90 bottom
U$216  [I_SUPER2_C-()-03]  19.43,61.21 0 top
U$217  [INT8]  46.23,52.2 90 top
U$218  [INT8]  46.23,52.2 90 bottom
U$219  [U#BLOX3]  35.56,73.15 0 bottom
U$220  [QWIIC-LOGO-MEDIUM]  18.29,54.86 0 bottom
U$221  [#RST3]  41.15,51.94 90 top
U$222  [#RST3]  41.15,51.94 90 bottom
U$223  [#SAFE1]  43.69,51.94 90 top
U$224  [#SAFE1]  43.69,51.94 90 bottom
U$225  [PPS5]  38.61,52.2 90 top
U$226  [PPS5]  38.61,52.2 90 bottom
U$227  [PPS0]  46.86,72.14 90 top
U$228  [FENCE2]  50.67,70.61 90 top
U$229  [JP20]  48.13,80.01 90 bottom
U$230  [RTK1]  48.77,72.01 90 top
U$231  [FENCE0]  33.53,52.32 90 top
U$232  [FENCE0]  33.53,52.32 90 bottom
U$233  [RTK1]  36.07,52.07 90 bottom
U$234  [RTK1]  36.07,52.07 90 top
U$235  [3V3-04]  28.45,87.38 90 bottom
U$236  [3V3-04]  28.45,87.38 90 top
U$237  [GND-04]  23.37,87.25 90 bottom
U$238  [GND-04]  23.37,87.25 90 top
U$239  [JP10]  45.59,80.01 90 bottom
U$240  [JP32]  50.67,80.01 90 bottom
U$241  [DSEL0]  35.56,61.09 0 bottom
U$242  [PWR-()-03]  44.96,71.76 90 top
U$243  [5V]  25.91,88.39 90 top
U$244  [5V]  25.91,88.39 90 bottom
U$245  [CS#-<]]  36.07,88.65 90 top
U$246  [CS#-<]]  36.07,88.65 90 bottom
U$247  [SCK-(]-04]  43.69,87.63 90 top
U$248  [SCK-(]-04]  43.69,87.63 90 bottom
U$249  [SFE_LOGO_FLAME_.1]  33.4,85.6 0 top
U$250  [RX#MOSI3]  38.61,84.96 90 bottom
U$251  [TX#MISO1]  41.15,84.84 90 bottom
U$252  [GND3]  11.56,72.14 0 top
U$253  [GPS#RTK28]  40,70.1 0 bottom
U$254  [3V3-04]  11.43,77.22 0 top
U$255  [3V3-04]  16.13,77.22 0 bottom
U$256  [GND3]  16.38,72.14 0 bottom
U$257  [CORRECTION0]  9.02,87.12 0 top
U$258  [RTCM5]  10.16,88.39 0 top
U$259  [ZED#F9P6]  37.85,67.06 0 bottom
U$260  [RTCM5]  16.13,88.39 0 bottom
U$261  [CORRECTION0]  18.29,87.12 0 bottom
U$262  [RX#MOSI3]  38.61,84.96 90 top
U$263  [TX#MISO1]  41.15,84.84 90 top
U$264  SMA-ANTENNA-THREADED  [SMA-THREADED]  48.51,58.67 0 top
U$265  [ACTIVE_L1#L21]  50.17,62.1 90 top
U$266  [ANTENNA2]  51.31,62.86 90 top
U$267  [RX20]  33.53,87.38 90 top
U$268  [RX22]  11.43,79.76 0 top
U$269  [TX21]  30.99,87.38 90 top
U$270  [TX23]  11.43,82.3 0 top
U$271  [TX21]  30.99,87.38 90 bottom
U$272  [RX20]  33.53,87.38 90 bottom
U$273  [TX21]  16.26,82.3 0 bottom
U$274  [RX20]  16.13,79.76 0 bottom
U$275  [GPS0]  43.81,87.76 0 top
U$276  [RTK21]  42.67,85.22 0 top
U$277  [SDA-[)]  74.68,52.2 90 top
U$278  [SCL-[)]  77.22,52.2 90 top
U$279  [SDA-[)]  74.68,52.2 90 bottom
U$280  [SCL-[)]  77.22,52.2 90 bottom
U$281  [3V3-04]  72.14,52.2 90 top
U$282  [3V3-04]  72.14,52.2 90 bottom
U$283  [GND-04]  69.6,52.2 90 top
U$284  [GND-04]  69.6,52.2 90 bottom
U$285  [I_SUPER2_C-()-03]  65.66,61.21 0 top
U$286  [INT8]  92.46,52.2 90 top
U$287  [INT8]  92.46,52.2 90 bottom
U$288  [U#BLOX3]  81.79,73.15 0 bottom
U$289  [QWIIC-LOGO-MEDIUM]  64.52,54.86 0 bottom
U$290  [#RST3]  87.38,51.94 90 top
U$291  [#RST3]  87.38,51.94 90 bottom
U$292  [#SAFE1]  89.92,51.94 90 top
U$293  [#SAFE1]  89.92,51.94 90 bottom
U$294  [PPS5]  84.84,52.2 90 top
U$295  [PPS5]  84.84,52.2 90 bottom
U$296  [PPS0]  93.09,72.14 90 top
U$297  [FENCE2]  96.9,70.61 90 top
U$298  [JP20]  94.36,80.01 90 bottom
U$299  [RTK1]  95,72.01 90 top
U$300  [FENCE0]  79.76,52.32 90 top
U$301  [FENCE0]  79.76,52.32 90 bottom
U$302  [RTK1]  82.3,52.07 90 bottom
U$303  [RTK1]  82.3,52.07 90 top
U$304  [3V3-04]  74.68,87.38 90 bottom
U$305  [3V3-04]  74.68,87.38 90 top
U$306  [GND-04]  69.6,87.25 90 bottom
U$307  [GND-04]  69.6,87.25 90 top
U$308  [JP10]  91.82,80.01 90 bottom
U$309  [JP32]  96.9,80.01 90 bottom
U$310  [DSEL0]  81.79,61.09 0 bottom
U$311  [PWR-()-03]  91.19,71.76 90 top
U$312  [5V]  72.14,88.39 90 top
U$313  [5V]  72.14,88.39 90 bottom
U$314  [CS#-<]]  82.3,88.65 90 top
U$315  [CS#-<]]  82.3,88.65 90 bottom
U$316  [SCK-(]-04]  89.92,87.63 90 top
U$317  [SCK-(]-04]  89.92,87.63 90 bottom
U$318  [SFE_LOGO_FLAME_.1]  79.63,85.6 0 top
U$319  [RX#MOSI3]  84.84,84.96 90 bottom
U$320  [TX#MISO1]  87.38,84.84 90 bottom
U$321  [GND3]  57.78,72.14 0 top
U$322  [GPS#RTK28]  86.23,70.1 0 bottom
U$323  [3V3-04]  57.66,77.22 0 top
U$324  [3V3-04]  62.36,77.22 0 bottom
U$325  [GND3]  62.61,72.14 0 bottom
U$326  [CORRECTION0]  55.25,87.12 0 top
U$327  [RTCM5]  56.39,88.39 0 top
U$328  [ZED#F9P6]  84.07,67.06 0 bottom
U$329  [RTCM5]  62.36,88.39 0 bottom
U$330  [CORRECTION0]  64.52,87.12 0 bottom
U$331  [RX#MOSI3]  84.84,84.96 90 top
U$332  [TX#MISO1]  87.38,84.84 90 top
U$333  SMA-ANTENNA-THREADED  [SMA-THREADED]  94.74,58.67 0 top
U$334  [ACTIVE_L1#L21]  96.39,62.1 90 top
U$335  [ANTENNA2]  97.54,62.86 90 top
U$336  [RX20]  79.76,87.38 90 top
U$337  [RX22]  57.66,79.76 0 top
U$338  [TX21]  77.22,87.38 90 top
U$339  [TX23]  57.66,82.3 0 top
U$340  [TX21]  77.22,87.38 90 bottom
U$341  [RX20]  79.76,87.38 90 bottom
U$342  [TX21]  62.48,82.3 0 bottom
U$343  [RX20]  62.36,79.76 0 bottom
U$344  [GPS0]  90.04,87.76 0 top
U$345  [RTK21]  88.9,85.22 0 top
U$346  [SDA-[)]  120.9,52.2 90 top
U$347  [SCL-[)]  123.44,52.2 90 top
U$348  [SDA-[)]  120.9,52.2 90 bottom
U$349  [SCL-[)]  123.44,52.2 90 bottom
U$350  [3V3-04]  118.36,52.2 90 top
U$351  [3V3-04]  118.36,52.2 90 bottom
U$352  [GND-04]  115.82,52.2 90 top
U$353  [GND-04]  115.82,52.2 90 bottom
U$354  [I_SUPER2_C-()-03]  111.89,61.21 0 top
U$355  [INT8]  138.68,52.2 90 top
U$356  [INT8]  138.68,52.2 90 bottom
U$357  [U#BLOX3]  128.02,73.15 0 bottom
U$358  [QWIIC-LOGO-MEDIUM]  110.74,54.86 0 bottom
U$359  [#RST3]  133.6,51.94 90 top
U$360  [#RST3]  133.6,51.94 90 bottom
U$361  [#SAFE1]  136.14,51.94 90 top
U$362  [#SAFE1]  136.14,51.94 90 bottom
U$363  [PPS5]  131.06,52.2 90 top
U$364  [PPS5]  131.06,52.2 90 bottom
U$365  [PPS0]  139.32,72.14 90 top
U$366  [FENCE2]  143.13,70.61 90 top
U$367  [JP20]  140.59,80.01 90 bottom
U$368  [RTK1]  141.22,72.01 90 top
U$369  [FENCE0]  125.98,52.32 90 top
U$370  [FENCE0]  125.98,52.32 90 bottom
U$371  [RTK1]  128.52,52.07 90 bottom
U$372  [RTK1]  128.52,52.07 90 top
U$373  [3V3-04]  120.9,87.38 90 bottom
U$374  [3V3-04]  120.9,87.38 90 top
U$375  [GND-04]  115.82,87.25 90 bottom
U$376  [GND-04]  115.82,87.25 90 top
U$377  [JP10]  138.05,80.01 90 bottom
U$378  [JP32]  143.13,80.01 90 bottom
U$379  [DSEL0]  128.02,61.09 0 bottom
U$380  [PWR-()-03]  137.41,71.76 90 top
U$381  [5V]  118.36,88.39 90 top
U$382  [5V]  118.36,88.39 90 bottom
U$383  [CS#-<]]  128.52,88.65 90 top
U$384  [CS#-<]]  128.52,88.65 90 bottom
U$385  [SCK-(]-04]  136.14,87.63 90 top
U$386  [SCK-(]-04]  136.14,87.63 90 bottom
U$387  [SFE_LOGO_FLAME_.1]  125.86,85.6 0 top
U$388  [RX#MOSI3]  131.06,84.96 90 bottom
U$389  [TX#MISO1]  133.6,84.84 90 bottom
U$390  [GND3]  104.01,72.14 0 top
U$391  [GPS#RTK28]  132.46,70.1 0 bottom
U$392  [3V3-04]  103.89,77.22 0 top
U$393  [3V3-04]  108.58,77.22 0 bottom
U$394  [GND3]  108.84,72.14 0 bottom
U$395  [CORRECTION0]  101.47,87.12 0 top
U$396  [RTCM5]  102.62,88.39 0 top
U$397  [ZED#F9P6]  130.3,67.06 0 bottom
U$398  [RTCM5]  108.58,88.39 0 bottom
U$399  [CORRECTION0]  110.74,87.12 0 bottom
U$400  [RX#MOSI3]  131.06,84.96 90 top
U$401  [TX#MISO1]  133.6,84.84 90 top
U$402  SMA-ANTENNA-THREADED  [SMA-THREADED]  140.97,58.67 0 top
U$403  [ACTIVE_L1#L21]  142.62,62.1 90 top
U$404  [ANTENNA2]  143.76,62.86 90 top
U$405  [RX20]  125.98,87.38 90 top
U$406  [RX22]  103.89,79.76 0 top
U$407  [TX21]  123.44,87.38 90 top
U$408  [TX23]  103.89,82.3 0 top
U$409  [TX21]  123.44,87.38 90 bottom
U$410  [RX20]  125.98,87.38 90 bottom
U$411  [TX21]  108.71,82.3 0 bottom
U$412  [RX20]  108.58,79.76 0 bottom
U$413  [GPS0]  136.27,87.76 0 top
U$414  [RTK21]  135.13,85.22 0 top

## Library data of the parts
B1-B6 = SparkFun-Batteries; PROD_ID: BATT-13734
C1 C12 C19 C26 C33 C40 = SparkFun-Capacitors; PROD_ID: CAP-08913
C2-C4 C6 C8 C9 C11 C13 C15 C16 C18 C20 C22 C23 C25 C27 C29 C30 C32 C34 C36 C37 C39 C41 = SparkFun-Capacitors; PROD_ID: CAP-00868
C5 C7 C10 C14 C17 C21 C24 C28 C31 C35 C38 C42 = SparkFun-Capacitors; PROD_ID: CAP-00810
D1 D6 D11 D16 D21 D26 = SparkFun-LED; PROD_ID: DIO-09003
D2 D7 D12 D17 D22 D27 = SparkFun-DiscreteSemi; PROD_ID: DIO-10955
D3 D8 D13 D18 D23 D28 = SparkFun-LED; PROD_ID: DIO-00821
D4 D9 D14 D19 D24 D29 = SparkFun-LED; PROD_ID: DIO-08575
D5 D10 D15 D20 D25 D30 = funbit
E$1 E$2 LOGO1-LOGO12 U$33 U$111 U$180 U$249 U$318 U$387 = SparkFun-Aesthetics
E$3 = SparkFun-Retired
FB1-FB6 = SparkFun-Coils; MFG_PART: BLM15HB121SN1D; PROD_ID: NDUC-14206
J1 J7 J14 J16 J22 J24 J30 J32 J38 J40 J46 J48 = SparkFun-Connectors
J2 J4 J8 J10 J17 J19 J25 J27 J33 J35 J41 J43 = SparkFun-Connectors; PROD_ID: CONN-13694
J3 J9 J18 J26 J34 J42 = SparkX
J5 J12 J21 J29 J37 J45 = USB-C
J6 J15 J23 J31 J39 J47 = SparkFun-Connectors; PROD_ID: CONN-08437
J11 J13 J20 J28 J36 J44 = SparkFun-Connectors; PROD_ID: CONN-09193; SF_ID: WRL-09144
JP1-JP5 JP10 JP11 JP16-JP18 JP24 JP25 JP30 JP32 JP33 JP38 JP39 JP45-JP47 JP52 JP53 JP58-JP60 JP66 JP67 JP73-JP75 = SparkFun-Jumpers
JP6-JP9 JP12-JP15 JP19-JP23 JP26-JP29 JP31 JP34-JP37 JP40-JP44 JP48-JP51 JP54-JP57 JP61-JP65 JP68-JP72 JP81 JP91 JP101 = SparkFun
LED1-LED6 = SparkFun-LED; PROD_ID: DIO-00819
R1 R5 R11-R13 R30 R31 R34 R37 R38 R55 R56 R59 R62 R63 R80 R81 R84 R87 R88 R105 R106 R109 R112 R113 R130 R131 R134 R137 R138 = SparkFun-Resistors; PROD_ID: RES-07856
R2-R4 R6 R18-R27 R32 R33 R43-R52 R57 R58 R68-R77 R82 R83 R93-R102 R107 R108 R118-R127 R132 R133 R143-R150 = SparkFun-Resistors; PROD_ID: RES-08270
R7 R8 R28 R29 R53 R54 R78 R79 R103 R104 R128 R129 = SparkFun-Resistors; PROD_ID: RES-08272
R9 R10 R35 R36 R60 R61 R85 R86 R110 R111 R135 R136 = SparkFun-Resistors; PROD_ID: RES-09334
R14 R39 R64 R89 R114 R139 = SparkFun-Resistors; PROD_ID: RES-12581
R15 R40 R65 R90 R115 R140 = SparkFun-Resistors; PROD_ID: RES-07828
R16 R17 R41 R42 R66 R67 R91 R92 R116 R117 R141 R142 = SparkFun-Resistors; PROD_ID: RES-12083
U1 U2 U5 U7 U9 U11 = SparkFun-IC-Power; PROD_ID: VREG-12457
U3 U4 U6 U8 U10 U12 = ZED-F9P
U$1-U$10 U$18-U$20 U$23 U$24 U$30 U$38 U$41 U$47 U$60-U$63 U$66 U$67 U$72-U$78 U$82 U$97-U$100 U$104-U$110 U$116 U$117 U$139-U$147 U$151 U$166-U$169 U$173-U$179 U$185 U$186 U$208-U$216 U$220 U$235-U$238 U$242-U$248 U$254 U$255 U$277-U$285 U$289 U$304-U$307 U$311-U$317 U$323 U$324 U$346-U$354 U$358 U$373-U$376 U$380-U$386 U$392 U$393 = Labels
U$11-U$13 U$90-U$92 U$159-U$161 U$228-U$230 U$297-U$299 U$366-U$368 = buzzard_labels
U$14 U$17 U$28 U$29 U$93-U$96 U$162-U$165 U$231-U$234 U$300-U$303 U$369-U$372 = buzzard_labels (1)
U$15 U$16 U$22 U$25 U$32 U$79-U$81 U$101 U$102 U$148-U$150 U$170 U$171 U$217-U$219 U$239 U$240 U$286-U$288 U$308 U$309 U$355-U$357 U$377 U$378 = buzzard_labels (5)
U$21 U$42 U$50 U$51 U$55-U$58 U$129-U$136 U$198-U$205 U$267-U$274 U$336-U$343 U$405-U$412 = buzzard_labels (10)
U$26 U$31 U$34 U$37 U$112 U$113 U$124 U$125 U$181 U$182 U$193 U$194 U$250 U$251 U$262 U$263 U$319 U$320 U$331 U$332 U$388 U$389 U$400 U$401 = buzzard_labels (36)
U$27 U$103 U$172 U$241 U$310 U$379 = buzzard_labels (6)
U$35 U$36 U$39 U$40 U$43 U$44 U$83-U$88 U$152-U$157 U$221-U$226 U$290-U$295 U$359-U$364 = buzzard_labels (7)
U$45 U$46 U$48 U$49 U$53 U$59 U$64 U$68-U$70 U$114 U$115 U$118-U$123 U$137 U$138 U$183 U$184 U$187-U$192 U$206 U$207 U$252 U$253 U$256-U$261 U$275 U$276 U$321 U$322 U$325-U$330 U$344 U$345 U$390 U$391 U$394-U$399 U$413 U$414 = buzzard_labels (4)
U$52 U$89 U$158 U$227 U$296 U$365 = buzzard_labels (33)
U$54 U$126 U$195 U$264 U$333 U$402 = SparkFun-Hardware
U$65 U$71 U$127 U$128 U$196 U$197 U$265 U$266 U$334 U$335 U$403 U$404 = buzzard_labels (8)